# Altium PCB motordriver-v6.3.1.PcbDoc (part 2 of 2)
Units mm, origin at the board's own origin, x right, y up, seen from the top; angles counter-clockwise.
Board outline 43 x 47 mm, 4 copper layers (TOP, GND, POWER, BOT), stack 0.603 mm thick; 165 components, 77 nets, 427 pads, 347 vias.
Unrouted connection lines stored in the file: 27.
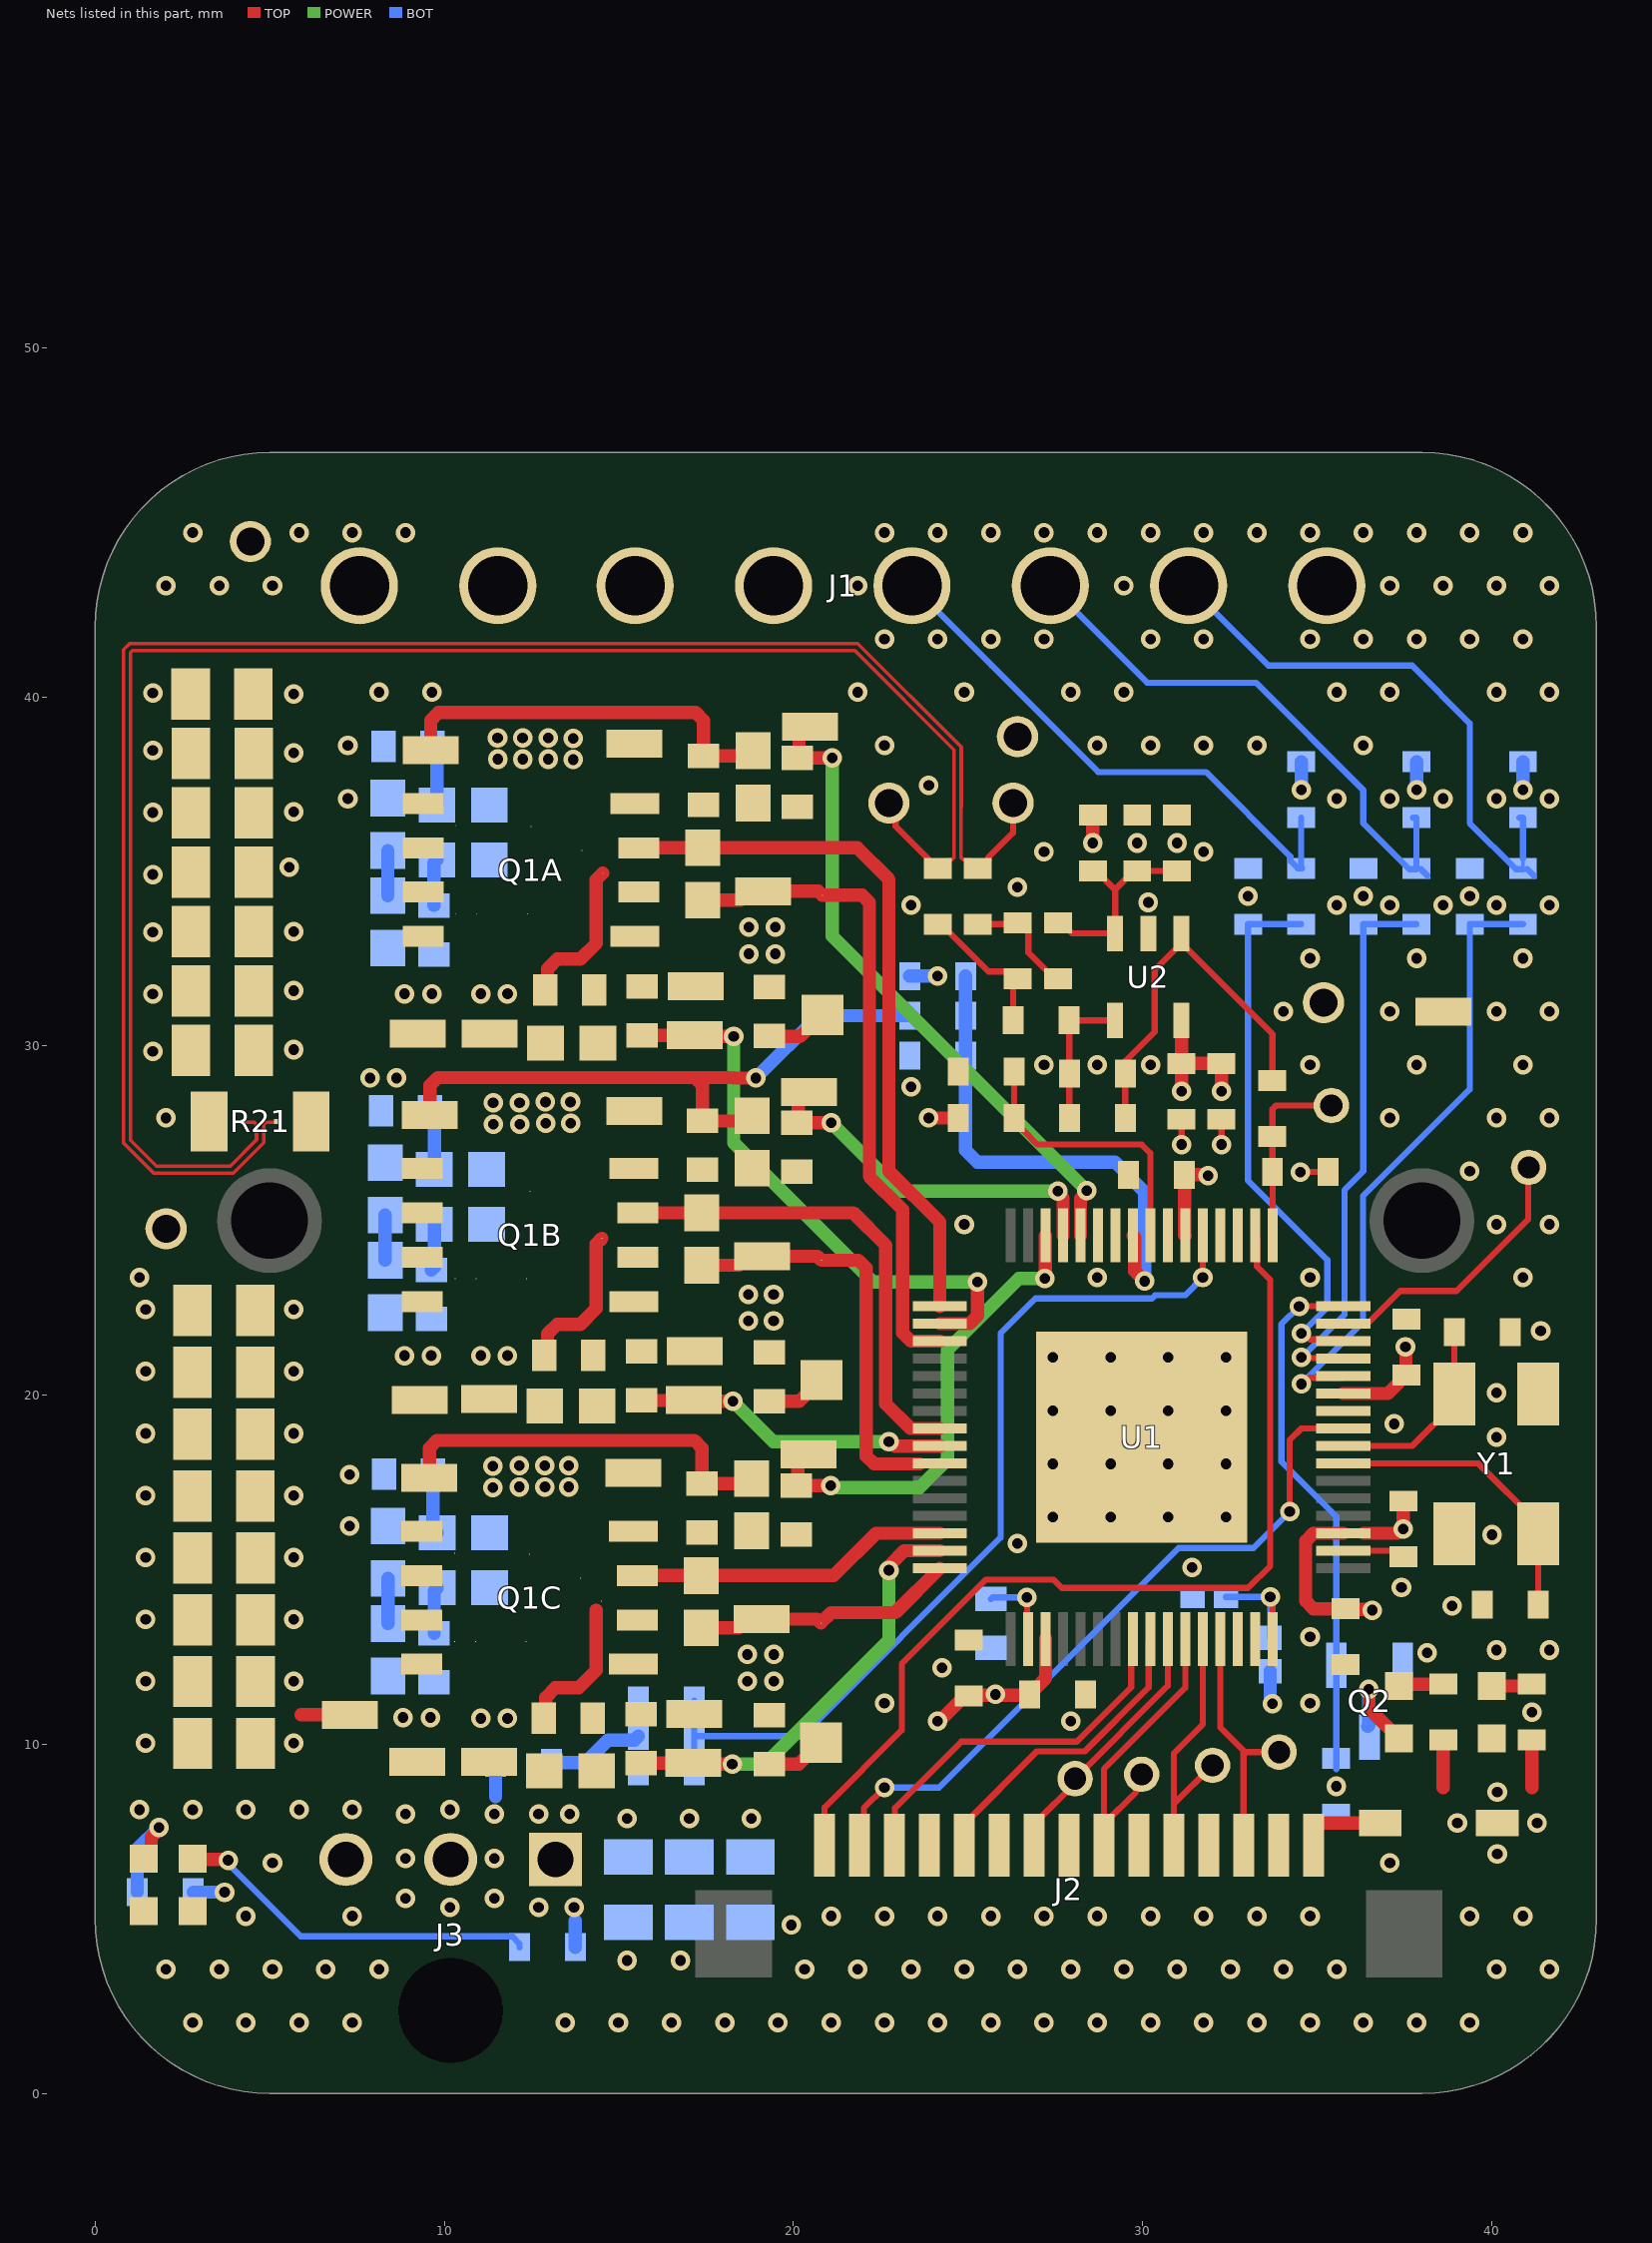
[diagram p4: the nets of this part, all layers, seen from the top]

## Via types
v1: diameter 0.559, hole 0.305, TOP to BOT, tented both sides, 347 vias

## Nets (pads, with @x,y where several pads share a name; then routed paths per layer and width w, separated by ;. In a path a pad name is that pad's centre, name@x,y a point inside that pad or via, vN(x,y) a via of type N, cw(c..) or ccw(c..) an arc to the next point about the centre after c; other vN are vias at no path point)
BOOT0: R20.1 R27.1 U1.64 | length 3.7
  TOP w0.178: v1(33.655,14.224) 33.722,14.157 U1.64@33.722,13.018
  BOT w0.178: R27.1@32.385,14.224 v1(33.655,14.224) R20.1@33.655,13.048
BOOTA: BOOTA.1 C47A.2 D9A.1 U1.35 | length 18.5
  TOP w0.381: C47A.2@17.399,34.175 18.47,34.175 BOOTA.1@18.726,34.431 ; BOOTA.1@19.126,34.431 20.712,34.431 D9A.1@20.828,34.315 21.971,34.315 22.174,34.112 22.174,26.264 23.127,25.311 23.127,21.785 23.366,21.546 U1.35@24.194,21.546
BOOTB: BOOTB.1 C47B.2 D9B.1 U1.42 | length 11.6
  TOP w0.381: C47B.2@17.374,23.721 18.445,23.721 BOOTB.1@18.701,23.978 ; BOOTB.1@19.101,23.978 20.687,23.978 D9B.1@20.803,23.862 21.864,23.862 22.087,23.639 22.087,18.257 22.31,18.034 U1.42@23.609,18.034
BOOTC: BOOTC.1 C47C.2 D9C.1 U1.48 | length 7.2
  TOP w0.381: C47C.2@17.358,13.333 18.429,13.333 BOOTC.1@18.686,13.589 ; BOOTC.1@19.086,13.589 20.672,13.589 D9C.1@20.787,13.473 21.086,13.772 22.919,13.772 U1.48@24.194,15.046
CIN: C19.2 R23.2 R24.2 U1.25 | length 14.6
  TOP w0.381: U1.25@29.722,24.575 29.773,24.524 29.773,23.555 v1(30.063,23.265)
  BOT w0.381: R23.2@24.93,32.004 R24.2@24.93,30.867 C19.2@24.93,29.718 24.93,27.013 25.273,26.67 29.21,26.67 30.063,25.817 v1(30.063,23.265)
CRYSTAL_F0: C13.2 U1.7 Y1.1 | length 8.6
  TOP w0.178: U1.7@35.75,18.046 39.612,18.046 41.332,16.326 Y1.1@41.332,16.034 C13.2@41.332,14.002
CRYSTAL_F1: C14.2 U1.8 Y1.3 | length 5.7
  TOP w0.178: U1.8@35.75,18.546 37.723,18.546 38.932,19.755 Y1.3@38.932,20.034 C14.2@38.932,21.812
CURR_FB: C16.2 C_FB.1 R17.2 U1.17 | length 5.4
  TOP w0.178: U1.17@33.722,24.575 33.722,26.387 C16.2@33.719,26.391 33.716,26.393 R17.2@33.716,27.409 33.716,28.191 33.82,28.296 C_FB.1@35.408,28.296
GND: C1.1 C2.1 C3.1 C4.1 C5.1 C6.1 C7.1 C8.1 C9.1 C10.2 C11.1 C12.1 C13.1 C14.1 C16.1 C17.1 C19.1 C20.1 C21.1 C22.1 C29.1 C30.1 C31.1 C32.1 C33.1 C34.1 C35.1 C37.1 C38.1 C39.1 C40.1 C41.1 C42.1 C43.1 C44.1 D1.2 D2.2 D3.2 GND.1 J1.8 J2.04 J2.06 J2.08 J2.10 J2.12 J2.14 J3.3 Q2.2 R8.2 R12.1 R21.2 R27.2 R37.2 R38.1 R41.1 TP8.1 TP9.1 TP12.1 U1.2 U1.10 U1.23 U1.26 U1.27 U1.EPAD U2.2 Y1.2 Y1.4 | length 4
  TOP w0.178: v1(31.115,27.178) C11.1@31.115,27.902 ; v1(32.258,27.178) C12.1@32.258,27.902 ; v1(34.519,26.391) C16.1@35.319,26.391 ; U1.2@35.75,15.546 37.286,15.546 C1.1@37.465,15.367
  other v1: 2.794,2.032 4.318,2.032 5.842,2.032 7.366,2.032 13.462,2.032 14.986,2.032 16.51,2.032 18.034,2.032 19.558,2.032 21.082,2.032 22.606,2.032 24.13,2.032 25.654,2.032 27.178,2.032 28.702,2.032 30.226,2.032 31.75,2.032 33.274,2.032 34.798,2.032 36.322,2.032 37.846,2.032 39.37,2.032 2.032,3.556 3.556,3.556 5.08,3.556 6.604,3.556 8.128,3.556 20.32,3.556 21.844,3.556 23.368,3.556 24.892,3.556 26.416,3.556 27.94,3.556 29.464,3.556 30.988,3.556 32.512,3.556 34.036,3.556 35.56,3.556 40.132,3.556 41.656,3.556 15.24,3.81 16.764,3.81 19.939,4.826 4.318,5.08 7.366,5.08 21.082,5.08 22.606,5.08 24.13,5.08 25.654,5.08 27.178,5.08 28.702,5.08 30.226,5.08 31.75,5.08 33.274,5.08 34.798,5.08 39.37,5.08 40.894,5.08 5.08,6.604 37.084,6.604 1.27,8.128 2.794,8.128 4.318,8.128 5.842,8.128 7.366,8.128 35.544,8.798 1.448,10.03 27.94,10.668 41.148,10.922 22.606,11.176 34.798,11.176 1.448,11.805 24.257,12.192 38.151,12.624 40.132,12.7 41.656,12.7 34.798,13.081 1.448,13.579 38.862,13.97 37.414,14.491 31.42,15.062 1.448,15.354 26.416,15.748 40.005,16.002 27.432,16.51 29.083,16.51 30.734,16.51 32.385,16.51 1.448,17.129 27.432,18.034 29.083,18.034 30.734,18.034 32.385,18.034 40.132,18.796 1.448,18.904 37.211,19.177 27.432,19.558 29.083,19.558 30.734,19.558 32.385,19.558 40.132,20.066 1.448,20.679 27.432,21.082 29.083,21.082 30.734,21.082 32.385,21.082 41.402,21.844 1.448,22.454 1.27,23.368 28.702,23.368 34.798,23.368 40.894,23.368 24.892,24.892 40.132,24.892 41.656,24.892 39.37,26.416 2.032,27.94 37.084,27.94 40.132,27.94 41.656,27.94 23.368,28.829 27.178,29.464 28.702,29.464 30.226,29.464 34.798,29.464 37.846,29.464 40.894,29.464 1.651,29.842 34.036,30.988 37.084,30.988 40.132,30.988 41.656,30.988 1.651,31.49 34.798,32.512 37.846,32.512 40.894,32.512 1.651,33.264 23.368,34.036 35.56,34.036 37.084,34.036 38.608,34.036 40.132,34.036 41.656,34.036 30.165,34.112 33.02,34.29 36.322,34.29 39.37,34.29 26.416,34.544 1.651,34.912 27.178,35.56 31.75,35.56 29.845,35.814 30.988,35.814 1.651,36.687 35.56,37.084 37.084,37.084 38.608,37.084 40.132,37.084 41.656,37.084 23.876,37.465 1.651,38.462 22.606,38.608 28.702,38.608 30.226,38.608 31.75,38.608 33.274,38.608 36.322,38.608 1.651,40.11 8.128,40.132 9.652,40.132 21.844,40.132 24.892,40.132 27.94,40.132 29.464,40.132 35.56,40.132 37.084,40.132 40.132,40.132 41.656,40.132 22.606,41.656 24.13,41.656 25.654,41.656 27.178,41.656 30.226,41.656 31.75,41.656 34.798,41.656 36.322,41.656 37.846,41.656 39.37,41.656 40.894,41.656 2.032,43.18 3.556,43.18 5.08,43.18 21.844,43.18 29.464,43.18 37.084,43.18 38.608,43.18 40.132,43.18 41.656,43.18 2.794,44.704 5.842,44.704 7.366,44.704 8.89,44.704 22.606,44.704 24.13,44.704 25.654,44.704 27.178,44.704 28.702,44.704 30.226,44.704 31.75,44.704 33.274,44.704 34.798,44.704 36.322,44.704 37.846,44.704 39.37,44.704 40.894,44.704
GPIO_PA4: Q2.1 R38.2 U1.16 | length 15.4
  TOP w0.178: v1(34.484,22.546) U1.16@35.75,22.546
  BOT w0.178: v1(34.484,22.546) 33.976,22.038 33.976,18.097 35.55,16.523 35.55,9.294
GPIO_PA7: U1.19
GPIO_PB0: U1.20
HALL_1: J1.2 R1.2 R4.1 | length 16.4
  BOT w0.102: R4.1@40.894,35.09 R4.1@40.894,35.371
  BOT w0.178: J1.2@31.318,43.18 33.604,40.894 37.719,40.894 39.37,39.243 39.37,36.384 40.689,35.065 R4.1@40.894,35.065 ; R1.2@40.794,36.538 R1.2@40.894,36.538 R4.1@40.894,35.371 ; R4.1@41.019,35.065 R4.1@41.205,34.879
HALL_1_MCU: C7.2 R4.2 U1.12 | length 18
  TOP w0.178: v1(34.544,20.32) 34.618,20.32 34.793,20.495 35.7,20.495 U1.12@35.75,20.546
  BOT w0.178: v1(34.544,20.32) 36.31,22.086 36.31,25.7 39.37,28.761 C7.2@39.37,33.49 R4.2@40.894,33.49
HALL_2: J1.3 R2.2 R5.1 | length 16.2
  BOT w0.178: J1.3@27.356,43.18 30.131,40.405 33.246,40.405 36.322,37.329 36.322,36.384 37.641,35.065 R5.1@37.846,35.065 ; R2.2@37.746,36.538 R2.2@37.846,36.538 R5.1@37.846,35.09 ; R5.1@37.971,35.065 R5.1@38.157,34.879
HALL_2_MCU: C8.2 R5.2 U1.13 | length 15.9
  TOP w0.178: v1(34.544,21.082) 34.562,21.064 35.732,21.064 U1.13@35.75,21.046
  BOT w0.178: v1(34.544,21.082) 34.559,21.082 35.788,22.311 35.788,25.882 36.322,26.416 C8.2@36.322,33.49 R5.2@37.846,33.49
HALL_E: J1.4 R3.2 R6.1 | length 16
  BOT w0.178: J1.4@23.393,43.18 25.679,40.894 28.727,37.846 31.812,37.846 34.233,35.425 34.233,35.301 34.444,35.09 R6.1@34.568,35.09 ; R6.1@34.544,35.09 R3.2@34.544,36.538
HALL_E_MCU: C9.2 R6.2 U1.14 | length 15.8
  TOP w0.178: v1(34.544,21.768) 34.618,21.768 34.789,21.597 35.7,21.597 U1.14@35.75,21.546
  BOT w0.178: v1(34.544,21.768) 35.293,22.517 35.293,23.876 33.02,26.149 C9.2@33.02,33.49 R6.2@34.544,33.49
HGA: C48A.2 HGA.1 Q1A.1 R30A.2 R33A.2
HGB: C48B.2 HGB.1 Q1B.1 R30B.2 R33B.2
HGC: C48C.2 HGC.1 Q1C.1 R30C.2 R33C.2
HV: C29.2 C30.2 C31.2 C32.2 C33.2 C34.2 C35.2 C37.2 C38.2 C39.2 C40.2 C41.2 C42.2 C43.2 C44.2 C46A.2 C46B.2 C46C.2 J3.2 Q1A.7 Q1A.7,8 Q1A.8 Q1B.7 Q1B.7,8 Q1B.8 Q1C.7 Q1C.7,8 Q1C.8 R16.2 R28A.2 R28B.2 R28C.2 R39.1 TP10A.1 TP10B.1 TP10C.1 TP11.1 | length 3.3
  TOP w0.381: 5.893,10.846 TP11.1@7.29,10.846
  BOT w0.381: R16.2@2.807,5.766 v1(3.708,5.766) ; 11.468,8.496 R39.1@11.468,9.474
  other v1: 10.16,5.334 8.89,5.588 11.43,5.588 8.89,6.731 11.43,6.731 8.89,8.001 11.43,8.001 10.16,8.128 5.69,10.03 8.814,10.77 9.601,10.77 5.69,11.805 5.69,13.579 5.69,15.354 5.69,17.129 5.69,18.904 5.69,20.679 8.865,21.133 9.627,21.133 5.69,22.454 5.69,29.896 8.865,31.496 9.652,31.496 5.69,31.585 5.69,33.274 5.56,35.118 5.69,36.703 5.69,38.392 5.69,40.081
HVGA: HVGA.1 R30A.1 U1.34 | length 16.4
  TOP w0.178: HVGA.1@17.17,30.316 HVGA.1@17.21,30.277
  TOP w0.381: R30A.1@15.672,30.302 HVGA.1@17.156,30.302 ; HVGA.1@17.21,30.277 v1(18.288,30.277) ; U1.34@24.194,22.046 25.044,22.047 25.273,22.276 v1(25.273,23.241)
  POWER w0.381: v1(18.288,30.277) 18.288,27.229 22.276,23.241 v1(25.273,23.241)
HVGB: HVGB.1 R30B.1 U1.41 | length 9.1
  TOP w0.178: HVGB.1@17.145,19.863 HVGB.1@17.185,19.823 ; U1.41@24.192,18.544 U1.41@24.194,18.546
  TOP w0.381: R30B.1@15.646,19.849 HVGB.1@17.131,19.849 ; HVGB.1@17.185,19.823 v1(18.263,19.823) ; v1(22.733,18.669) 22.781,18.669 22.906,18.544 U1.41@24.192,18.544
  POWER w0.381: v1@18.266,19.823 19.42,18.669 v1(22.733,18.669)
HVGC: HVGC.1 R30C.1 U1.47 | length 12.3
  TOP w0.178: HVGC.1@17.13,9.474 HVGC.1@17.169,9.435
  TOP w0.381: R30C.1@15.631,9.46 HVGC.1@17.116,9.46 ; HVGC.1@17.169,9.435 v1(18.247,9.435) ; v1(22.733,14.986) 22.767,15.02 22.767,15.14 23.172,15.545 U1.47@24.194,15.546
  POWER w0.381: v1(18.247,9.435) 19.188,9.435 22.733,12.979 v1(22.733,14.986)
LGA: C51A.2 LGA.1 Q1A.4 R34A.2 R36A.2
LGB: C51B.2 LGB.1 Q1B.4 R34B.2 R36B.2
LGC: C51C.2 LGC.1 Q1C.4 R34C.2 R36C.2
LVGA: LVGA.1 R34A.1 U1.28 | length 18.8
  TOP w0.178: R34A.1@20.117,38.252 R34A.1@20.118,38.251
  TOP w0.381: R34A.1@20.117,38.252 20.161,38.297 20.161,38.83 LVGA.1@20.472,39.141 ; R34A.1@20.118,38.251 v1(21.108,38.251) ; U1.28@28.222,24.575 28.222,25.634 28.397,25.809 v1(28.397,25.857)
  POWER w0.381: v1(21.108,38.251) 21.108,33.147 21.895,32.36 v1(28.397,25.857)
LVGB: LVGB.1 R34B.1 U1.29 | length 10.7
  TOP w0.178: R34B.1@20.091,27.799 R34B.1@20.093,27.797
  TOP w0.381: R34B.1@20.091,27.799 20.136,27.843 20.136,28.377 LVGB.1@20.447,28.688 ; R34B.1@20.093,27.797 v1(21.082,27.797) ; v1(27.569,25.842) 27.569,25.793 27.722,25.64 U1.29@27.722,24.575
  POWER w0.381: v1(21.082,27.797) 23.038,25.842 v1(27.569,25.842)
LVGC: LVGC.1 R34C.1 U1.30 | length 13.7
  TOP w0.178: R34C.1@20.076,17.41 R34C.1@20.078,17.409 ; v1(27.203,23.343) v1@27.213,23.352 ; U1.30@27.213,24.565 U1.30@27.222,24.575
  TOP w0.381: R34C.1@20.076,17.41 20.121,17.455 20.121,17.988 LVGC.1@20.432,18.299 ; R34C.1@20.078,17.409 v1(21.067,17.409) ; v1@27.213,23.352 U1.30@27.213,24.565
  POWER w0.381: v1(21.067,17.409) 21.101,17.375 21.227,17.375 21.253,17.348 23.612,17.348 24.415,18.151 24.415,21.301 26.168,23.054 26.457,23.343 v1@27.18,23.343
MD_ENABLE: J2.01 U1.18 | length 27.7
  TOP w0.178: J2.01@20.892,7.112 20.892,8.192 23.101,10.401 23.101,12.306 25.514,14.719 27.445,14.719 27.686,14.478 33.02,14.478 33.655,15.113 33.655,23.304 33.274,23.685 33.274,23.749 33.273,23.75 33.273,24.524 U1.18@33.222,24.575
NetC15_1: C15.1 R18.1 R19.2 | length 4.2
  TOP w0.178: R19.2@24.13,33.49 24.23,33.49 25.585,32.135 26.205,32.135 C15.1@26.416,31.924 26.289,31.797 R18.1@26.289,30.734
NetC15_2: C15.2 R14.1 R15.2 | length 3.4
  TOP w0.178: R15.2@25.273,33.49 26.382,33.49 C15.2@26.416,33.524 26.516,33.524 26.727,33.313 26.727,32.678 27.481,31.924 R14.1@27.581,31.924
NetC18_1: C18.1 R17.1 R22.2 U2.1 | length 10.6
  TOP w0.178: C18.1@29.502,28.321 29.502,29.464 29.502,29.564 30.344,30.406 30.344,32.173 U2.1@31.115,32.944 ; U2.1@31.115,33.223 U2.1@31.115,32.944 ; R17.1@33.716,29.009 33.716,30.343 U2.1@31.115,32.944
NetC20_2: C20.2 R25.1 U1.24 | length 7.9
  TOP w0.178: C20.2@26.321,29.269 26.321,28.2 26.327,28.194 R25.1@26.327,28.094 ; R25.1@26.327,27.94 26.327,27.84 R25.1@26.58,27.587 ; R25.1@26.58,27.587 26.989,27.178 29.972,27.178 30.222,26.928 U1.24@30.222,24.575
NetC45A_2: C45A.2 R28A.1 | length 1.3
  BOT w0.381: R28A.1@9.703,34.025 9.703,35.243 C45A.2@9.791,35.331
NetC45B_2: C45B.2 R28B.1 | length 1.3
  BOT w0.381: R28B.1@9.627,23.585 9.715,23.674 C45B.2@9.715,24.892
NetC45C_2: C45C.2 R28C.1 | length 1.3
  BOT w0.381: R28C.1@9.71,13.178 9.71,14.396 C45C.2@9.798,14.484
NetC46A_1: C46A.1 C49A.2 | length 1.3
  BOT w0.381: C46A.1@8.382,34.303 C49A.2@8.382,35.597
NetC46B_1: C46B.1 C49B.2 | length 1.3
  BOT w0.381: C46B.1@8.306,23.864 C49B.2@8.306,25.158
NetC46C_1: C46C.1 C49C.2 | length 1.3
  BOT w0.381: C46C.1@8.389,13.456 C49C.2@8.389,14.75
NetC50A_1: C50A.1 R35A.2 | length 1.4
  BOT w0.381: R35A.2@9.666,38.303 9.791,38.178 C50A.1@9.791,36.906
NetC50B_1: C50B.1 R35B.2 | length 1.4
  BOT w0.381: R35B.2@9.59,27.864 9.715,27.739 C50B.1@9.715,26.467
NetC50C_1: C50C.1 R35C.2 | length 1.4
  BOT w0.381: R35C.2@9.674,17.456 9.674,16.184 C50C.1@9.798,16.059
NetD1_1: D1.1 R11.1 | length 1.2
  TOP w0.381: D1.1@40.005,11.672 41.098,11.672 R11.1@41.148,11.722
NetD2_1: D2.1 R13.1 | length 10.5
  TOP w0.381: D2.1@2.794,6.719 2.813,6.7 3.791,6.7 v1(3.81,6.68)
  BOT w0.178: v1(3.81,6.68) 3.81,6.579 5.886,4.502 11.943,4.502 12.154,4.291 R13.1@12.154,4.191
NetD3_1: D3.1 R16.1 | length 3.2
  TOP w0.381: D3.1@1.397,6.719 1.607,6.929 1.607,7.35 1.829,7.572 v1(1.829,7.62)
  BOT w0.381: R16.1@1.207,5.766 1.207,6.998 v1(1.829,7.62)
NetD6_1: D6.1 R32.1 | length 1.3
  TOP w0.381: D6.1@37.338,11.672 37.388,11.722 R32.1@38.608,11.722
NetD6_2: D6.2 Q2.3 | length 2.8
  TOP w0.381: v1(36.474,11.582) 36.483,11.574 36.483,11.027 D6.2@37.338,10.172
  BOT w0.381: Q2.3@36.449,10.515 36.474,10.54 v1(36.474,11.582)
NetD9A_2: D9A.2 R26A.1 | length 2
  TOP w0.178: D9A.2@20.803,30.889 D9A.2@20.828,30.889
  TOP w0.381: R26A.1@19.101,30.277 20.19,30.277 D9A.2@20.803,30.889
NetD9B_2: D9B.2 R26B.1 | length 2
  TOP w0.178: D9B.2@20.778,20.436 D9B.2@20.803,20.436
  TOP w0.381: R26B.1@19.075,19.823 20.165,19.823 D9B.2@20.778,20.436
NetD9C_2: D9C.2 R26C.1 | length 2
  TOP w0.178: D9C.2@20.762,10.047 D9C.2@20.787,10.047
  TOP w0.381: R26C.1@19.06,9.435 20.15,9.435 D9C.2@20.762,10.047
NetR37_1: R37.1 U1.50 | length 2.3
  TOP w0.178: v1@26.67,14.224 26.696,14.198 26.696,13.043 U1.50@26.722,13.018
  BOT w0.178: R37.1@25.654,14.162 25.703,14.211 v1(26.683,14.211)
NetR39_2: R39.2 R40.1 | length 2.8
  BOT w0.381: R39.2@13.068,9.474 14.037,9.474 14.686,10.124 15.448,10.124 15.558,10.233 R40.1@15.558,10.236
NetTP13_1: TP13.1 U1.15 | length 8
  TOP w0.178: U1.15@35.75,22.046 35.801,22.097 36.485,22.097 37.375,22.987 38.989,22.987 41.046,25.044 41.046,26.513 TP13.1@41.057,26.524
NRST: J2.02 U1.9 | length 20.6
  TOP w0.178: J2.02@21.892,7.112 22.018,7.238 22.018,8.175 v1(22.606,8.763) ; v1(34.214,16.662) 34.214,18.72 34.54,19.046 U1.9@35.75,19.046
  BOT w0.178: v1(22.606,8.763) 24.171,8.763 31.029,15.621 33.172,15.621 v1(34.214,16.662)
OUTA: C45A.1 C47A.1 C48A.1 C50A.2 J1.7 OUT1A.1 Q1A.2 Q1A.2,3 Q1A.3 R33A.1 U1.33 | length 24.8
  TOP w0.381: R33A.1@12.889,31.598 12.957,31.666 12.957,32.21 13.233,32.487 13.899,32.487 14.351,32.938 14.351,34.759 14.539,34.947 ; Q1A.3@15.569,35.677 C47A.1@17.397,35.677 ; C47A.1@17.399,35.675 21.831,35.675 22.733,34.773 22.733,26.416 24.194,24.956 U1.33@24.194,22.546
  other v1: 11.049,31.496 11.811,31.496 13.696,38.202 11.532,38.216 12.248,38.216 12.979,38.216 13.691,38.811 11.526,38.825 12.243,38.825 12.974,38.825
OUTB: C45B.1 C47B.1 C48B.1 C50B.2 J1.6 OUT1B.1 Q1B.2 Q1B.2,3 Q1B.3 R33B.1 U1.40 | length 18.3
  TOP w0.381: R33B.1@12.889,21.143 12.957,21.211 12.957,21.755 13.233,22.032 13.899,22.032 14.351,22.483 14.351,24.33 14.514,24.493 ; Q1B.3@15.544,25.223 C47B.1@17.372,25.223 ; C47B.1@17.374,25.221 21.718,25.221 22.644,24.295 22.644,19.754 23.353,19.046 U1.40@24.194,19.046
  other v1: 11.049,21.133 11.811,21.133 11.405,27.762 12.161,27.762 12.903,27.788 13.62,27.788 11.399,28.372 12.155,28.372 12.898,28.397 13.614,28.397
OUTC: C45C.1 C47C.1 C48C.1 C50C.2 J1.5 OUT1C.1 Q1C.2 Q1C.2,3 Q1C.3 R33C.1 U1.46 | length 13.3
  TOP w0.381: R33C.1@12.838,10.729 12.906,10.797 12.906,11.341 13.183,11.618 13.848,11.618 14.351,12.12 14.351,13.843 ; Q1C.3@15.529,14.834 C47C.1@17.357,14.834 ; C47C.1@17.358,14.833 21.157,14.833 22.371,16.046 U1.46@24.194,16.046
  other v1: 11.049,10.744 11.811,10.744 11.392,17.355 12.151,17.374 12.883,17.374 13.569,17.374 11.387,17.964 12.146,17.983 12.878,17.983 13.564,17.983
SENSE: C49A.1 C49B.1 C49C.1 C51A.1 C51B.1 C51C.1 Q1A.5 Q1A.5,6 Q1A.6 Q1B.5 Q1B.5,6 Q1B.6 Q1C.5 Q1C.5,6 Q1C.6 R21.1 R24.1 R35A.1 R35B.1 R35C.1 R36A.1 R36B.1 R36C.1 SENSE1A.1 SENSE1B.1 SENSE1C.1 | length 41
  TOP w0.381: SENSE1C.1@9.572,17.628 9.572,18.482 9.795,18.706 17.161,18.706 17.384,18.482 R36C.1@17.384,17.464 18.657,17.464 C51C.1@18.806,17.613 ; SENSE1B.1@9.587,28.017 9.587,28.871 9.81,29.094 17.176,29.094 ; SENSE1A.1@9.612,38.471 9.612,39.325 9.835,39.548 17.201,39.548 17.424,39.325 R36A.1@17.424,38.306 18.697,38.306 C51A.1@18.847,38.456 ; C51B.1@18.821,28.002 18.672,27.853 R36B.1@17.399,27.853 17.399,28.871 17.176,29.094 ; v1(18.923,29.083) 18.288,29.083 18.277,29.094 17.176,29.094
  BOT w0.381: v1(18.923,29.083) 20.707,30.867 R24.1@23.33,30.867
  other v1: 7.29,16.256 7.29,17.729 7.874,29.083 8.636,29.083 7.239,37.084 7.239,38.608
SENSE_F_N: C18.2 R18.2 R22.1 U2.4 | length 3.7
  TOP w0.178: C18.2@27.902,28.321 27.902,29.464 27.902,30.721 R18.2@27.889,30.734 U2.4@29.215,30.734
SENSE_F_P: C10.1 R7.2 R12.2 R14.2 U2.3 | length 5.9
  TOP w0.178: R14.2@27.581,33.524 27.681,33.524 27.982,33.223 U2.3@29.215,33.223 29.215,34.484 ; R7.2@28.575,35.014 28.675,35.014 29.205,34.484 29.215,34.484 ; C10.1@30.988,35.014 29.745,35.014 29.215,34.484
SENSE_N: R19.1 R21.S2 S_N.1 | length 50
  TOP w0.102: R21.S2@4.248,27.838 4.274,27.813 4.563,27.813 4.623,27.753 4.623,27.313 3.87,26.56 1.761,26.56 1.016,27.305 1.016,41.266 1.076,41.326 21.76,41.326 24.602,38.483 24.602,36.937 24.6,36.935 24.6,35.399 24.54,35.339 24.379,35.339 R19.1@24.13,35.09
  TOP w0.178: S_N.1@22.733,36.957 22.925,36.765 22.925,36.295 R19.1@24.13,35.09
SENSE_P: R15.1 R21.S1 S_P.1 | length 51.2
  TOP w0.102: R21.S1@5.201,27.838 5.175,27.813 4.886,27.813 4.826,27.753 4.826,27.229 3.954,26.356 1.677,26.356 0.813,27.221 0.813,41.35 0.991,41.529 21.844,41.529 24.806,38.567 24.806,36.853 24.803,36.85 24.803,35.399 24.863,35.339 25.108,35.339 R15.1@25.357,35.09
  TOP w0.178: R15.1@25.373,35.09 25.584,35.301 25.584,35.401 26.289,36.106 S_P.1@26.289,36.957
SPI_CLK: CLK.1 J2.09 U1.59 | length 9.3
  TOP w0.178: CLK.1@29.972,9.144 29.812,8.984 29.812,8.632 28.892,7.712 J2.09@28.892,7.112 28.892,9.287 31.222,11.617 U1.59@31.222,13.018
SPI_CS: CS.1 J2.07 U1.58 | length 7.5
  TOP w0.178: J2.07@26.892,7.112 26.892,7.712 CS.1@28.132,8.952 ; CS.1@28.067,9.017 30.722,11.672 U1.58@30.722,13.018
SPI_MISO: J2.11 MISO.1 U1.60 | length 8
  TOP w0.178: J2.11@30.892,7.112 30.892,8.128 ; U1.60@31.722,13.018 31.722,10.568 30.892,9.738 30.892,8.128 ; MISO.1@32.004,9.398 30.892,8.286 30.892,8.128
SPI_MOSI: J2.13 MOSI.1 U1.61 | length 7.2
  TOP w0.178: U1.61@32.222,13.018 32.222,10.488 32.892,9.818 ; J2.13@32.892,7.112 32.892,9.818 ; MOSI.1@33.909,9.779 32.931,9.779 32.892,9.818
SWD_CLK: J2.05 U1.57 | length 8.9
  TOP w0.178: J2.05@24.892,7.112 24.892,7.712 26.978,9.798 28.34,9.798 30.171,11.629 30.171,12.967 U1.57@30.222,13.018
SWD_IO: J2.03 U1.56 | length 10.7
  TOP w0.178: J2.03@22.892,7.112 22.907,7.127 22.907,8.175 24.809,10.077 28.111,10.077 29.671,11.637 29.671,12.967 U1.56@29.722,13.018
UART_RX: U1.63
UART_TX: U1.62
VBUS_FDBK: R8.1 R40.2 R41.2 U1.21 | length 26.7
  TOP w0.178: U1.21@31.722,24.575 31.722,23.371 v1(31.725,23.368)
  BOT w0.178: R8.1@17.158,9.22 R40.2@17.158,10.236 ; R41.2@17.158,11.252 R40.2@17.158,10.236 ; v1(31.725,23.368) 31.217,22.86 30.358,22.86 30.268,22.769 26.935,22.769 25.933,21.768 25.933,15.917 20.252,10.236 R40.2@17.158,10.236
VCC: C5.2 C6.2 C17.2 C21.2 C22.2 J3.1 R13.2 R25.2 R26A.2 R26B.2 R26C.2 U1.51 | length 6.3
  TOP w0.381: v1(23.876,27.94) R25.2@24.727,27.94 ; v1(24.13,10.668) 24.164,10.702 24.229,10.702 24.919,11.392 C6.2@25.019,11.392 25.038,11.411 25.762,11.411 v1(25.781,11.43) 25.803,11.408 26.737,11.408 C5.2@26.759,11.43 ; C5.2@26.759,11.53 26.869,11.64 26.969,11.64 27.222,11.893 U1.51@27.222,13.018
  BOT w0.381: R13.2@13.754,4.191 13.754,4.953
  other v1: 12.7,5.334 13.716,5.334 15.24,7.874 17.018,7.874 18.796,7.874 12.7,8.001 13.589,8.001 18.679,11.811 19.441,11.811 18.679,12.573 19.441,12.573 18.711,22.124 19.431,22.123 18.705,22.886 19.431,22.885 18.72,32.639 19.482,32.639 18.72,33.401 19.482,33.401
Vdd: C1.2 C2.2 C3.2 C4.2 C11.2 C12.2 D5.C J1.1 R1.1 R2.1 R3.1 R7.1 R11.2 R20.2 R23.1 R32.2 U1.3 U1.11 U1.22 U2.5 | length 23.9
  TOP w0.381: v1(28.575,35.814) R7.1@28.575,36.614 ; v1(31.115,28.702) C11.2@31.115,29.502 ; U2.5@31.115,30.734 C11.2@31.115,29.502 ; U1.22@31.222,24.575 31.207,24.59 31.207,26.299 C3.2@31.191,26.314 31.852,26.314 v1(31.877,26.289) ; v1(32.258,28.702) C12.2@32.258,29.502 C11.2@31.115,29.502 ; U1.3@35.75,16.046 34.894,16.046 34.671,15.823 34.671,14.104 34.894,13.881 C2.2@35.814,13.881 35.833,13.862 36.557,13.862 v1(36.576,13.843) ; U1.11@35.75,20.046 37.017,20.046 37.344,20.372 37.344,20.473 37.453,20.582 C4.2@37.553,20.582 37.54,20.595 37.54,21.369 v1(37.528,21.382) ; U1.3@36.335,16.043 37.293,16.043 37.417,16.167 v1(37.465,16.167) C1.2@37.465,16.967 ; 38.608,8.763 R32.2@38.608,10.122 ; 41.148,8.763 R11.2@41.148,10.122
  BOT w0.381: R23.1@23.33,32.004 v1(24.13,32.004) ; R20.2@33.655,12.098 33.655,11.272 33.718,11.209 v1(33.718,11.161) ; v1(34.544,37.338) R3.1@34.544,38.138 ; v1(37.846,37.338) R2.1@37.846,38.138 ; v1(40.894,37.338) R1.1@40.894,38.138
  other v1: 40.157,6.858 39.014,7.747 41.3,7.747 40.157,8.636
VDD_UI: D5.A J2.15 | length 2.2
  TOP w0.381: J2.15@34.924,7.366 34.924,7.638 35.034,7.747 D5.A@36.805,7.747
pads on no net: J2.S1 J2.S2 J3.4 U1.1 U1.4 U1.5 U1.6 U1.31 U1.32 U1.36 U1.37 U1.38 U1.39 U1.43 U1.44 U1.45 U1.49 U1.52 U1.53 U1.54 U1.55

## Polygon pours and split planes (outlines as drawn)
GND on TOP "GND_L-01_P-001" (solid, remove dead copper, pour order 279): 0,2.686 ccw(c2.54,2.686) 2.54,0.146 40.46,0.146 ccw(c40.46,2.686) 43,2.686 43,44.606 ccw(c40.46,44.606) 40.46,47.146 2.54,47.146 ccw(c2.54,44.606) 0,44.606
HV on TOP "HV_L01_P230" (solid, pour order 274): 3.607,40.996 3.607,29.007 6.299,29.007 6.299,40.996
SENSE on TOP "SENSE_L01_P231" (solid, pour order 275): 6.426,14.122 10.846,14.122 10.846,19.177 8.28,19.177 8.28,24.511 8.306,24.536 10.846,24.536 10.846,29.54 8.255,29.54 8.255,35.052 8.255,35.077 10.897,35.077 10.897,39.141 6.375,39.141
HV on TOP "HV_L01_P229" (solid, pour order 273): 3.658,23.19 3.658,9.144 6.35,9.144 6.35,23.19
OUTA on TOP "OUTA_L01_P213" (solid, pour order 257): 11.125,39.218 11.125,35.103 13.97,35.103 14.046,35.179 14.046,39.218
LGA on TOP "LGA_L01_P214" (solid, pour order 258): 14.3,39.218 16.535,39.218 16.535,37.668 20.777,37.668 20.777,36.297 20.676,36.297 14.3,36.297
HGA on TOP "HGA_L01_P215" (solid, pour order 260): 14.681,33.68 14.681,32.156 13.665,32.156 13.665,29.54 15.088,29.54 15.088,31.09 18.161,31.09 18.161,32.36 16.231,32.36 16.231,33.68
VCC on TOP "VCC_L01_P217" (solid, pour order 261): 18.339,33.782 19.914,33.782 19.914,30.988 18.339,30.988
VCC on TOP "VCC_L01_P218" (solid, pour order 262): 18.263,23.343 19.837,23.343 19.837,20.549 18.263,20.549
HGB on TOP "HGB_L01_P219" (solid, pour order 263): 14.656,23.216 14.656,21.692 13.64,21.692 13.64,19.126 15.062,19.126 15.062,20.625 18.136,20.625 18.136,21.895 16.205,21.895 16.205,23.216
OUTB on TOP "OUTB_L01_P220" (solid, pour order 264): 11.074,28.753 11.074,24.638 13.995,24.638 13.995,28.753
HGC on TOP "HGC_L01_P221" (solid, pour order 265): 14.63,12.827 14.63,11.303 13.614,11.303 13.614,8.687 15.037,8.687 15.037,10.236 18.11,10.236 18.11,11.506 16.18,11.506 16.18,12.827
VCC on TOP "VCC_L01_P222" (solid, pour order 266): 18.288,13.03 19.863,13.03 19.863,10.236 18.288,10.236
OUTC on TOP "OUTC_L01_P223" (solid, pour order 267): 11.049,18.39 11.049,14.275 13.97,14.275 13.97,18.39
OUTA on TOP "OUTA_L01_P224" (solid, pour order 268): 10.287,32.156 10.287,29.54 13.665,29.54 13.665,32.156
LGB on TOP "LGB_L01_P225" (solid, pour order 269): 14.3,28.778 16.535,28.778 16.535,27.229 20.777,27.229 20.777,25.857 20.676,25.857 14.3,25.857
LGC on TOP "LGC_L01_P226" (solid, pour order 270): 14.3,18.415 16.535,18.415 16.535,16.866 20.777,16.866 20.777,15.494 20.676,15.494 14.3,15.494
OUTB on TOP "OUTB_L01_P227" (solid, pour order 271): 10.262,21.692 10.262,19.126 13.64,19.126 13.64,21.692
OUTC on TOP "OUTC_L01_P228" (solid, pour order 272): 10.236,11.303 10.236,8.687 13.614,8.687 13.614,11.303
HV on TOP "HV_L01_P232" (solid, pour order 276): 8.255,29.794 10.211,29.794 10.287,29.718 10.287,35.077 8.255,35.077
HV on TOP "HV_L01_P233" (solid, pour order 277): 8.28,19.228 10.261,19.228 10.312,24.511 8.28,24.511
HV on TOP "HV_L01_P234" (solid, pour order 278): 8.23,8.839 10.211,8.839 10.262,14.122 8.23,14.122
Vdd on TOP "VDD_L-01_P-001" (solid, pour order 256): 41.758,9.144 41.758,6.35 38.1,6.35 38.1,9.144
HV on POWER "NONET_L-01_P-001" (solid, pour order 253): 11.836,47 0,47 0,0 11.836,0
Vdd on POWER "NONET_L-01_P-001" (solid, pour order 255): 20.345,47 20.345,0 43,0 43,47.006 25.756,46.999
VCC on POWER "NONET_L-01_P-001" (solid, pour order 254): 26.244,12.09 26.822,11.512 26.822,9.982 26.568,9.728 23.673,9.728 20.117,6.172 20.117,0 12.04,0 12.04,46.376 20.117,46.379 20.117,33.782 25.4,28.499 25.4,26.924 20.117,26.924 20.117,12.497 20.523,12.09
GND on BOT "NONET_L-01_P-001" (solid, pour order 282): 0,0 38.328,0 40.46,0 ccw(c40.46,2.54) 43,2.54 43,44.46 ccw(c40.46,44.46) 40.46,47 2.54,47 ccw(c2.54,44.46) 0,44.46 0,2.54 ccw(c2.54,2.54) 2.54,0 4.672,0
SENSE on BOT "BOT-SENSE" (solid, pour order 239): 6.604,35.027 7.722,35.027 7.722,36.449 9.068,36.449 9.068,39.141 6.604,39.141 6.604,36.449
VCC on BOT "NONET_L-01_P-001" (solid, pour order 280): 14.224,6.096 19.685,6.096 19.685,8.509 12.192,8.509 12.192,4.953 14.224,4.953
HV on BOT "NONET_L-01_P-001" (solid, pour order 252): 8.509,8.509 8.509,4.826 11.811,4.826 11.811,8.509
OUTC on BOT "OUTC_L04_P196" (solid, pour order 240): 17.704,44.577 20.955,44.577 20.955,39.243 17.907,36.195 17.907,20.574 13.995,16.662 10.922,16.662 10.922,19.177 13.335,19.177 16.129,21.971 16.129,37.465 17.704,39.04
OUTB on BOT "OUTB_L04_P197" (solid, pour order 241): 10.668,29.337 14.224,29.337 14.224,44.577 17.526,44.577 17.526,39.116 16.002,37.592 16.002,27.203 10.668,27.203
OUTA on BOT "OUTA_L04_P198" (solid, pour order 242): 11.176,37.719 14.097,37.719 14.097,44.577 9.906,44.577 9.906,42.291 11.176,41.021
OUTA on BOT "OUTA_L04_P199" (solid, pour order 243): 10.643,37.49 12.192,37.49 12.192,31.14 10.643,31.14
HV on BOT "HV_L04_P200" (solid, pour order 245): 7.671,33.477 7.671,31.09 10.389,31.09 10.389,33.477
HV on BOT "HV_L04_P202" (solid, pour order 246): 7.595,23.114 7.595,20.726 10.312,20.726 10.312,23.114
HV on BOT "HV_L04_P203" (solid, pour order 247): 7.696,12.624 7.696,10.236 10.414,10.236 10.414,12.624
OUTB on BOT "OUTB_L04_P204" (solid, pour order 248): 10.643,27.051 12.192,27.051 12.192,20.701 10.643,20.701
OUTC on BOT "OUTC_L04_P205" (solid, pour order 249): 10.643,16.612 12.192,16.612 12.192,10.262 10.643,10.262
SENSE on BOT "SENSE_L04_P206" (solid, pour order 250): 9.271,29.591 7.112,29.591 7.112,26.01 9.271,26.01
SENSE on BOT "SENSE_L04_P207" (solid, pour order 251): 8.941,18.339 6.756,18.339 6.756,15.596 8.941,15.596
GND on GND "GND_L02_P216" (solid, pour order 259): 43.053,46.99 43.053,0 0.127,0 0,-0.127 0,46.99 0.254,46.99

## Keep-outs
Keep-Out Layer:
  the board outline again, w1.016

## Other copper
TOP:
  pour cut-out: 3.785,26.975 2.642,26.975 2.642,26.848 6.807,26.848 6.807,26.975 5.664,26.975 5.664,28.702 6.807,28.702 6.807,28.829 2.642,28.829 2.642,28.702 3.785,28.702

## Silkscreen, mask and mechanical layers (free items; w line width, h text height)
Top Overlay:
  drawing of 12 lines, arcs and shapes, not listed
  text "GND" at 23.622,38.536 h1.02
  text "Motor Driver V6.3.1 / Clint Lee / James Coffin / Jeannette Guo" at 32.512,29.445 h0.89
Bottom Overlay:
  region: 35.242,26.187 21.399,26.187 21.399,16.637 35.242,16.637
Mechanical 1:
  the board outline again, w0.254

## Dimensions
5,25 to 38,37.084 on Mechanical 1
38,37.084 to 0,0 on Mechanical 1
0,42 to 38,37.084 on Mechanical 1

## Text inside footprints (layer, text, board x,y; h text height)
J3: Mechanical 13 "MAX" at 3.833,-7.264 h1; Mechanical 13 "PCB Edge" at 5.103,-9.804 h1.27; Mechanical 13 "NPTH D3.00 +/-0.05" at 2.683,10.466 h0.5; Mechanical 13 "PTH D1.02 +/-0.05" at 2.683,11.216 h0.5
U1: Top Overlay "*" at 38.049,14.478 h1.27 r180; Mechanical 13 "*" at 34.912,15.431 h1.27 r180